# Altium PCB STM32_Breakout.PcbDoc (part 1 of 2)
Units mm, origin at the board's own origin, x right, y up, seen from the top; angles counter-clockwise.
Board outline 95 x 95 mm, 4 copper layers (F.Cu, In1.Cu, In2.Cu, B.Cu); 115 components, 175 nets, 535 pads, 365 vias.
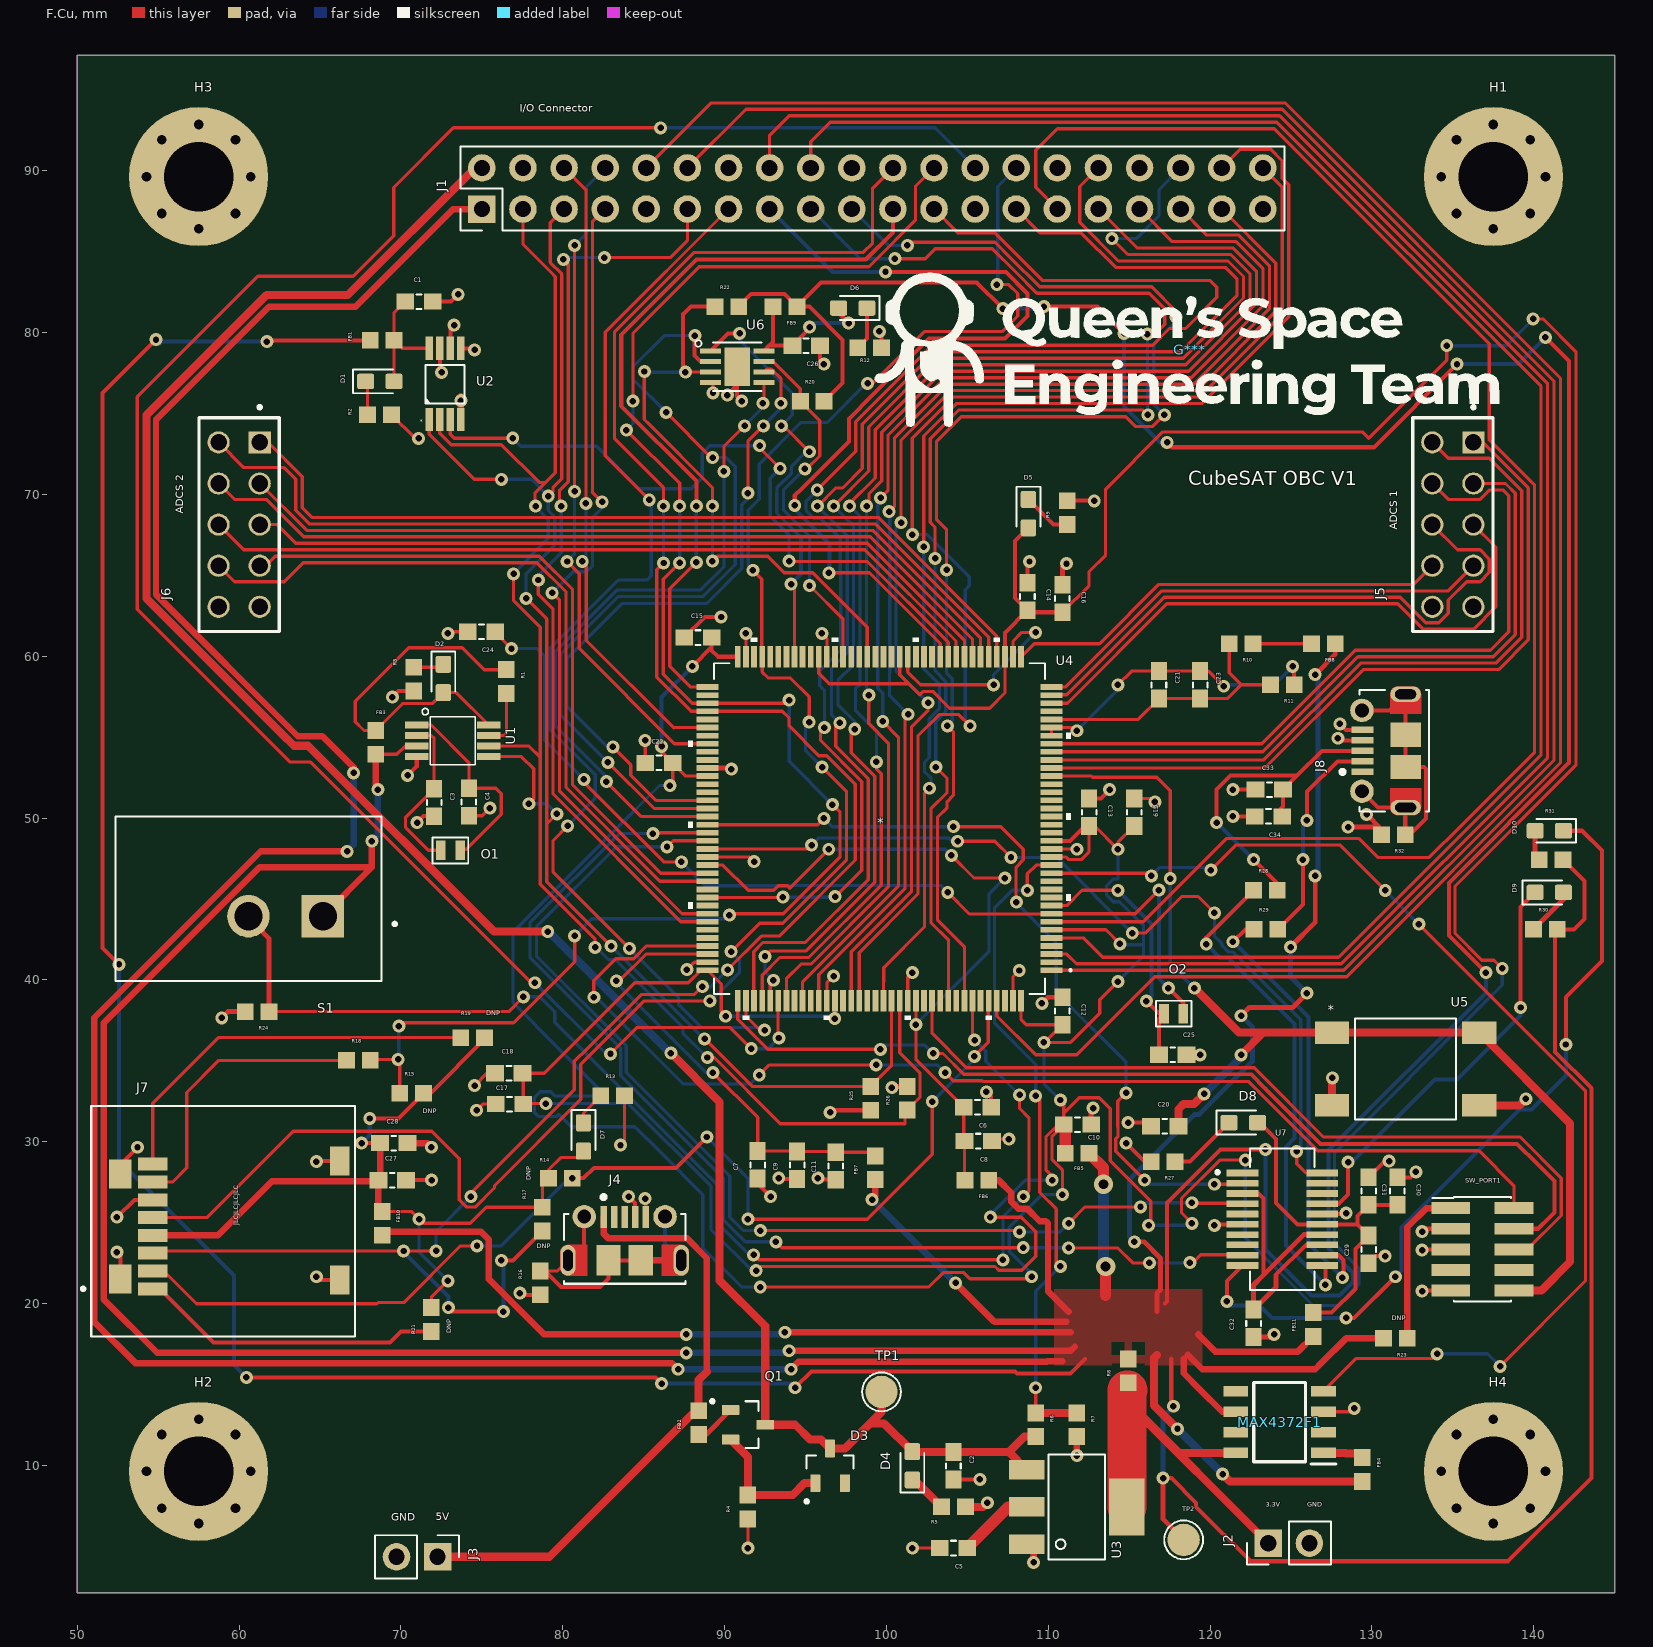
[diagram p0: F.Cu view]
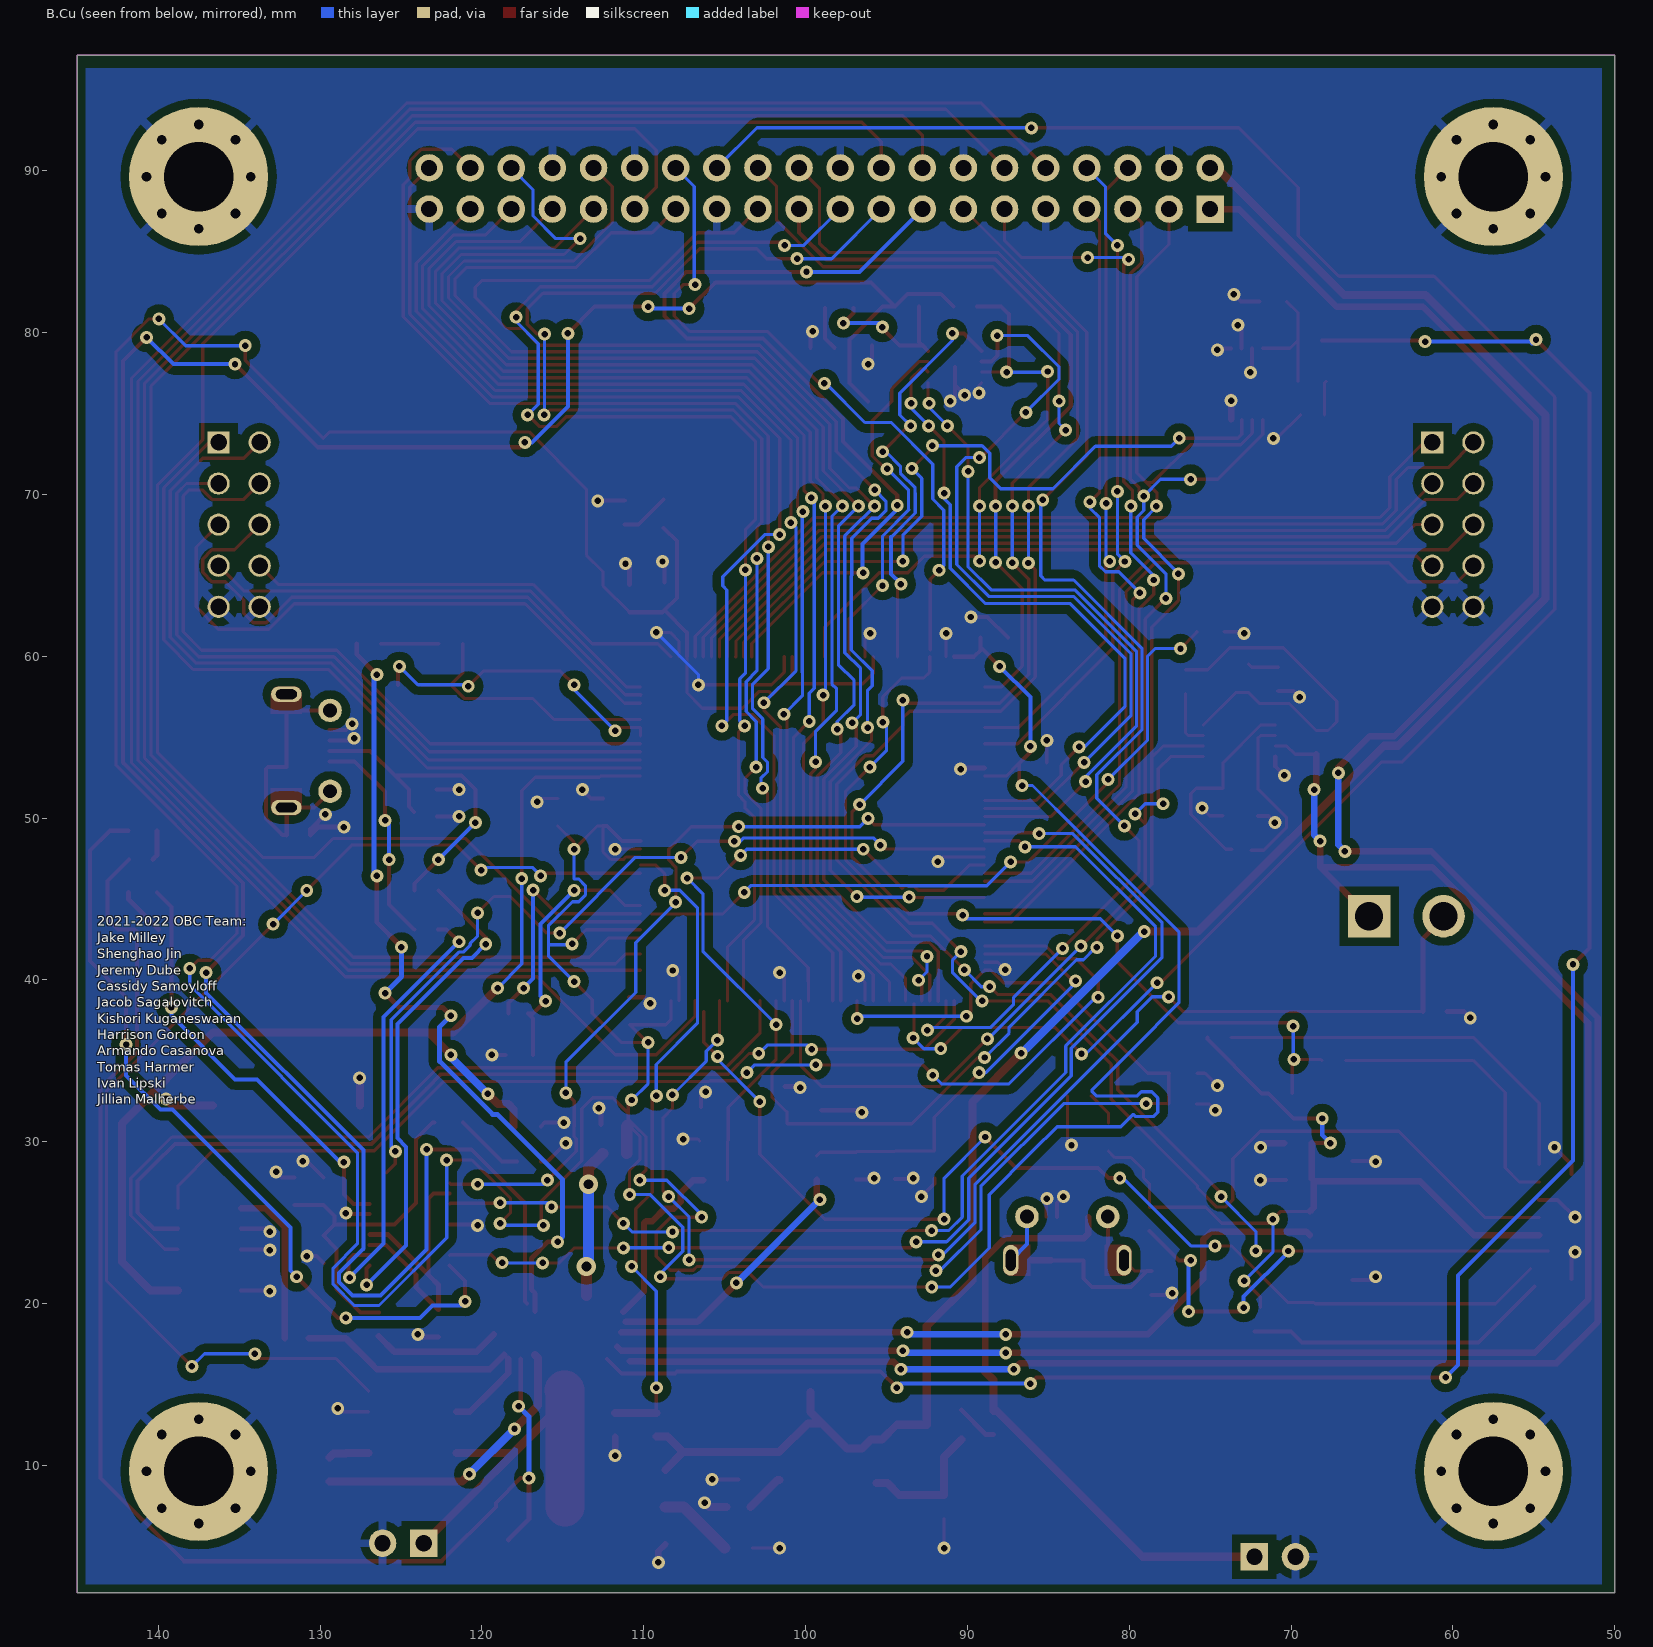
[diagram p1: B.Cu view, seen from below]

## Layer stack, top to bottom
F.Mask: solder mask 0.0102, Solder Resist, Dk 3.5
F.Cu: signal copper 0.0356
Dielectric 1: dielectric 0.32, FR-4, Dk 4.8
In1.Cu: signal copper 0.0356
Dielectric2: dielectric 0.32, FR-4, Dk 4.8
In2.Cu: signal copper 0.0356
Dielectric3: dielectric 0.32, FR-4, Dk 4.8
B.Cu: signal copper 0.0356
B.Mask: solder mask 0.0102, Solder Resist, Dk 3.5

## Board outline
145,2.13 145,97.13 50,97.13 50,2.13 145,2.13

## Design rules (kind name [scope] priority, off if disabled: settings)
Clearance "Clearence 0.508_Polygon" [InNamedPolygon('F.Cu-+3V3') OR InNamedPolygon('B.Cu-GND')] p1: gap=0.508 ignorepadtopadclearanceinfootprint=FALSE
MinimumSolderMaskSliver [All] p1: minsoldermaskwidth=0
PolygonConnect Polygon_B.Cu-GND_ConnectDirect [IsNamedPolygon('B.Cu-GND') vs IsVia] p1: connectstyle=Direct reliefconductorwidth=0.254 reliefentries=4 polygonreliefangle="90 Angle" airgapwidth=0.254
PolygonConnect Polygon_B.Cu-GND_ConnectRelief45 [IsNamedPolygon('B.Cu-GND') vs (IsThruPin or IsSMTPin) and (PadShape_AllLayers = 'Round')] p2: connectstyle=Relief reliefconductorwidth=0.508 reliefentries=4 polygonreliefangle="45 Angle" airgapwidth=0.508
PolygonConnect Polygon_B.Cu-GND_ConnectRelief90 [IsNamedPolygon('B.Cu-GND') vs (IsThruPin or IsSMTPin) and (PadShape_AllLayers <> 'Round')] p3: connectstyle=Relief reliefconductorwidth=0.508 reliefentries=4 polygonreliefangle="90 Angle" airgapwidth=0.508
PolygonConnect Polygon_F.Cu-+3V3_ConnectDirect [IsNamedPolygon('F.Cu-+3V3') vs IsVia] p4: connectstyle=Direct reliefconductorwidth=0.254 reliefentries=4 polygonreliefangle="90 Angle" airgapwidth=0.254
PolygonConnect Polygon_F.Cu-+3V3_ConnectRelief45 [IsNamedPolygon('F.Cu-+3V3') vs (IsThruPin or IsSMTPin) and (PadShape_AllLayers = 'Round')] p5: connectstyle=Relief reliefconductorwidth=0.508 reliefentries=4 polygonreliefangle="45 Angle" airgapwidth=0.508
PolygonConnect Polygon_F.Cu-+3V3_ConnectRelief90 [IsNamedPolygon('F.Cu-+3V3') vs (IsThruPin or IsSMTPin) and (PadShape_AllLayers <> 'Round')] p6: connectstyle=Relief reliefconductorwidth=0.508 reliefentries=4 polygonreliefangle="90 Angle" airgapwidth=0.508
RoutingVias [All] p1: holewidth=0.711 width=1.27 viastyle="Through Hole" minholewidth=0.711 minwidth=1.27 maxholewidth=0.711 maxwidth=1.27
SilkToSilkClearance [All] p1: silktosilkclearance=0
SilkToSolderMaskClearance [IsPad] p1: minsilkscreentomaskgap=0 clearancetoexposedcopper=TRUE
SolderMaskExpansion [All] p1: expansion=0.102 istentingtop=FALSE
Width [All] p1: maxlimit=10 minlimit=0.254 preferedwidth=0.254 midlayer1_maxwidth=0.254 midlayer2_maxwidth=0.254 minimp=50.000000 maximp=50.000000 favimp=50.000000
27 further rules are at their usual default settings.

## Components (designator, comment, footprint, x,y, rotation, side; value= is the part's Value field where it differs from the comment)
C1 "1uF" CAPC1608X90 71.115,81.91 r0 top
C2 "10uF" CAPC1608X90 104.14,9.97 r270 top
C3 "18pF" CAPC1608X90 72.05,50.963 r270 top
C4 "18pF" CAPC1608X90 74.2,50.993 r270 top
C5 "22uF" CAPC1608X90 104.14,4.89 r180 top
C6 "4.7u" CAPC1608X90 105.62,32.13 r180 top
C7 "4.7u" CAPC1608X90 92.04,28.57 r90 top
C8 "100n" CAPC1608X90 105.67,30.04 r180 top
C9 "100n" CAPC1608X90 94.48,28.55 r90 top
C10 "4.7u" CAPC1608X90 111.799,31.052 r180 top
C11 "100n" CAPC1608X90 96.87,28.5 r90 top
C12 "100n" CAPC1608X90 110.871,38.076 r270 top
C13 "100n" CAPC1608X90 112.522,50.356 r270 top
C14 "100n" CAPC1608X90 108.712,63.691 r270 top
C15 "100n" CAPC1608X90 88.353,61.151 r0 top
C16 "100n" CAPC1608X90 110.871,63.564 r270 top
C17 "100n" CAPC1608X90 76.708,32.322 r0 top
C18 "100n" CAPC1608X90 76.669,34.227 r0 top
C19 "100n" CAPC1608X90 115.316,50.356 r270 top
C20 "100n" CAPC1608X90 117.196,30.95 r0 top
C21 "1u" CAPC1608X90 116.84,58.23 r270 top
C22 "100n" CAPC1608X90 85.94,53.404 r0 top
C23 "100n" CAPC1608X90 119.38,58.23 r270 top
C24 "4.74pF" CAPC1608X90 74.98,61.513 r180 top
C25 "4.74pF" CAPC1608X90 117.69,35.37 r0 top
C26 "100n" CAPC1608X90 95.035,79.185 r180 top
C27 "10uF" CAPC1608X90 69.46,27.62 r0 top
C28 "0.1uF" CAPC1608X90 69.557,29.909 r0 top
C29 "4.7u" CAPC1608X90 129.794,23.344 r90 top
C30 "100n" CAPC1608X90 131.572,26.949 r270 top
C31 "100n" CAPC1608X90 129.794,26.949 r270 top
C32 "100n" CAPC1608X90 122.682,18.772 r90 top
C33 "47pF" CAPC1608X90 123.659,51.753 r0 top
C34 "47pF" CAPC1608X90 123.61,50.102 r180 top
D1 "RED" LED_0603_1608Metric_Pad1.05x0.95mm_HandSolder 68.695,76.98 r0 top
D2 "RED" LED_0603_1608Metric_Pad1.05x0.95mm_HandSolder 72.62,58.623 r270 top
D3 "10V" SOT91P240X110-3N 96.52,9.97 r90 top
D4 "RED" LED_0603_1608Metric_Pad1.05x0.95mm_HandSolder 101.6,9.97 r90 top
D5 "RED" LED_0603_1608Metric_Pad1.05x0.95mm_HandSolder 108.77,68.809 r270 top
D6 "RED" LED_0603_1608Metric_Pad1.05x0.95mm_HandSolder 97.915,81.51 r180 top
D7 "RED" LED_0603_1608Metric_Pad1.05x0.95mm_HandSolder 81.28,30.29 r270 top
D8 "RED" LED_0603_1608Metric_Pad1.05x0.95mm_HandSolder 122.047,31.179 r0 top
D9 "GREEN" LED_0603_1608Metric_Pad1.05x0.95mm_HandSolder 140.956,45.403 r0 top
D10 "GREEN" LED_0603_1608Metric_Pad1.05x0.95mm_HandSolder 140.956,49.213 r180 top
FB1 "100R @ 100 MHz" INDUC1607X60N 68.835,79.52 r0 top
FB2 "100R @ 100 MHz" INDUC1607X60N 88.392,12.637 r90 top
FB3 "100R @ 100 MHz" INDUC1607X60N 68.453,54.674 r90 top
FB4 "100R @ 100 MHz" INDUC1607X60N 129.413,9.743 r270 top
FB5 "100R @ 100 MHz" INDUC1607X60N 111.787,29.274 r0 top
FB6 "100R @ 100 MHz" INDUC1607X60N 105.59,27.63 r180 top
FB7 "100R @ 100 MHz" INDUC1607X60N 99.31,28.39 r90 top
FB8 "100R @ 100 MHz" INDUC1607X60N 127,60.77 r180 top
FB9 "100R @ 100 MHz" INDUC1607X60N 93.73,81.6 r180 top
FB10 "100R @ 100 MHz" INDUC1607X60N 68.834,24.956 r270 top
FB11 "100R @ 100 MHz" INDUC1607X60N 126.365,18.706 r90 top
G*** "LOGO" QSET_Logo 118.745,78.931 r0 top
H1 "MountingHole_Pad" MountingHole_4.3mm_M4_Pad_Via 137.5,89.63 r0 top
H2 "MountingHole_Pad" MountingHole_4.3mm_M4_Pad_Via 57.5,9.63 r0 top
H3 "MountingHole_Pad" MountingHole_4.3mm_M4_Pad_Via 57.5,89.63 r0 top
H4 "MountingHole_Pad" MountingHole_4.3mm_M4_Pad_Via 137.5,9.63 r0 top
J1 "Conn_02x20_Odd_Even" PinHeader_2x20_P2.54mm_Vertical 75,87.63 r90 top
J2 "1050171001" PinHeader_1x02_P2.54mm_Vertical 123.595,5.19 r90 top
J3 "1050171001" PinHeader_1x02_P2.54mm_Vertical 72.265,4.35 r270 top
J4 "105017-1001" MOLEX_105017-1001 83.82,22.67 r0 top
J5 "SSQ-105-03-T-D" SAMTEC_SSQ-105-03-T-D 135,68.13 r90 top
J6 "SSQ-105-03-T-D" SAMTEC_SSQ-105-03-T-D 60,68.13 r90 top
J7 "ST1W008S4ER1500-MicroSDConnector" JAE_ST1W008S4ER1500 58.663,24.758 r0 top
J8 "105017-1001" MOLEX_105017-1001 132.08,54.15 r90 top
MAX4372F1 "MAX4372FESA+" SOIC127P600X175-8N 124.29,12.67 r180 top
O1 "CM9V-T1A" CM9V-T1A 73.06,48.002 r0 top
O2 "CM9V-T1A" CM9V-T1A 117.745,37.91 r0 top
Q1 "Q_PMOS_DGS" SOT91P240X110-3N 91.44,12.51 r0 top
R1 "10k" RESC1607X60N 76.52,58.432 r270 top
R2 "2k2" RESC1607X60N 68.675,74.92 r0 top
R3 "2k2" RESC1607X60N 70.79,58.578 r270 top
R4 "10k" RESC1607X60N 91.44,7.43 r90 top
R5 "2k2" RESC1607X60N 104.14,7.43 r0 top
R6 "20k" RESC1607X60N 109.22,12.51 r270 top
R7 "10k" RESC1607X60N 111.76,12.51 r270 top
R8 "20m" RESC1607X60N 114.935,15.839 r90 top
R9 "2k2" RESC1607X60N 111.17,68.871 r90 top
R10 "10k +-1%" RESC1607X60N 121.92,60.77 r180 top
R11 "32.5k +-1%" RESC1607X60N 124.46,58.23 r180 top
R12 "2k2" RESC1607X60N 98.96,79.058 r0 top
R13 "2k2" RESC1607X60N 83.085,32.83 r0 top
R14 "47k" RESC1607X60N 79.85,27.75 r0 top
R15 "47k" RESC1607X60N 70.66,32.99 r0 top
R16 "0R" RESC1607X60N 78.613,21.273 r270 top
R17 "47k" RESC1607X60N 78.74,25.21 r270 top
R18 "33" RESC1607X60N 67.37,35.02 r0 top
R19 "47k" RESC1607X60N 74.43,36.43 r0 top
R20 "10k" RESC1607X60N 95.415,75.74 r0 top
R21 "47k" RESC1607X60N 71.882,19.014 r270 top
R22 "10k" RESC1607X60N 90.135,81.6 r0 top
R23 "0R" RESC1607X60N 131.445,17.844 r180 top
R24 "10k +-1%" RESC1607X60N 61.114,38.037 r180 top
R25 "10k" RESC1607X60N 99.02,32.68 r270 top
R26 "10k" RESC1607X60N 101.27,32.685 r90 top
R27 "2k2" RESC1607X60N 117.094,28.766 r180 top
R28 "27" RESC1607X60N 123.417,45.53 r0 top
R29 "27" RESC1607X60N 123.444,43.117 r0 top
R30 "2k2" RESC1607X60N 140.716,43.117 r0 top
R31 "2k2" RESC1607X60N 141.07,47.435 r0 top
R32 "0R" RESC1607X60N 131.318,48.959 r180 top
S1 "GF-123-0054" SW_GF-123-0054 60.579,45.022 r180 top
SW_PORT1 "Conn_02x05_Odd_Even" PinHeader_2x05_P1.27mm_Vertical_SMD 136.82,23.35 r0 top
TP1 "TestPoint" TestPoint_Pad_D2.0mm 99.695,14.542 r0 top
TP2 "TestPoint" TestPoint_Pad_D2.0mm 118.364,5.398 r0 top
U1 "MCP7940NT-I_MS" MCP7940NT-I-MS 73.2,54.773 r270 top
U2 "MCP9808" MCP9808 72.725,76.8 r0 top
U3 "BU33SA5WGWZ-E2-qsat-symb" BU33SA5WGWZ-E2 111.76,7.43 r270 top
U4 "STM32L4A6ZGT6P" LQFP144-20x20mm 99.568,49.34 r180 top
U5 "FSM6JSMATR" FSM6JSMATR 127.533,36.735 r0 top
U6 "MR25H10MDF" SON65P300X300X95-8N 90.775,77.88 r0 top
U7 "FT231XS-R" SOP63P599X175-20N 124.46,25.21 r0 top

## Footprints (in the part's own frame and the unit in brackets; to place one, negate y for a bottom-side part, rotate by r counter-clockwise, add the part's x,y. Pads: shape width x height; smd on the part's side, far side on the other; paste and mask are expansions set on the pad)
BU33SA5WGWZ-E2 [mm]
  rect 1.2x2.2 smd mask+0: 1(2.3,-3.1) 2(0,-3.1) 3(-2.3,-3.1)
  rect 3.5x2.2 smd mask+0: 4(0,3.1)
  silkscreen extent -3.25,-1.75 3.25,1.75
CAPC1608X90 [mm]
  rect 1.1x1 smd mask+0: 1(-0.85,0) 2(0.85,0)
  silkscreen extent -0.15,-0.45 0.15,0.45
CM9V-T1A [mm]
  rect 0.6x1.2 smd mask+0: 1(-0.6,0) 2(0.6,0)
  silkscreen extent -1.1,-0.8 1.1,0.8
FSM6JSMATR [mil]
  rect 83x55 smd mask+0: 1(0,0) 2(0,-177) 3(358,-177) 4(358,0)
  silkscreen extent 56,-212 302,34
INDUC1607X60N [mm]
  rect 1.04x1.02 smd mask+0: 1(-0.735,0) 2(0.735,0)
JAE_ST1W008S4ER1500 [mm]
  rect 1.8x0.8 smd mask+0: 1(-4,-3.85) 2(-4,-2.75) 3(-4,-1.65) 4(-4,-0.55) 5(-4,0.55) 6(-4,1.65) 7(-4,2.75) 8(-4,3.85)
  rect 1.2x1.8 smd mask+0: GND1(7.55,-3.3) GND2(7.55,4.05)
  rect 1.4x1.8 smd mask+0: GND3(-6,-3.25) GND4(-6,3.25)
  silkscreen extent -8.4,-6.8 8.5,7.45
LED_0603_1608Metric_Pad1.05x0.95mm_HandSolder [mm]
  rrect25% 1.05x0.95 smd mask+0: 1(-0.875,0) 2(0.875,0)
  silkscreen extent -1.66,-0.73 0.8,0.73
LQFP144-20x20mm [mm]
  rect 1.346x0.356 smd mask+0: 1(-10.625,8.75) 2(-10.625,8.25) 3(-10.625,7.75) 4(-10.625,7.25) 5(-10.625,6.75) 6(-10.625,6.25) 7(-10.625,5.75) 8(-10.625,5.25) 9(-10.625,4.75) 10(-10.625,4.25) 11(-10.625,3.75) 12(-10.625,3.25) 13(-10.625,2.75) 14(-10.625,2.25) 15(-10.625,1.75) 16(-10.625,1.25) 17(-10.625,0.75) 18(-10.625,0.25) 19(-10.625,-0.25) 20(-10.625,-0.75) 21(-10.625,-1.25) 22(-10.625,-1.75) 23(-10.625,-2.25) 24(-10.625,-2.75) 25(-10.625,-3.25) 26(-10.625,-3.75) 27(-10.625,-4.25) 28(-10.625,-4.75) 29(-10.625,-5.25) 30(-10.625,-5.75) 31(-10.625,-6.25) 32(-10.625,-6.75) 33(-10.625,-7.25) 34(-10.625,-7.75) 35(-10.625,-8.25) 36(-10.625,-8.75) 73(10.625,-8.75) 74(10.625,-8.25) 75(10.625,-7.75) 76(10.625,-7.25) 77(10.625,-6.75) 78(10.625,-6.25) 79(10.625,-5.75) 80(10.625,-5.25) 81(10.625,-4.75) 82(10.625,-4.25) 83(10.625,-3.75) 84(10.625,-3.25) 85(10.625,-2.75) 86(10.625,-2.25) 87(10.625,-1.75) 88(10.625,-1.25) 89(10.625,-0.75) 90(10.625,-0.25) 91(10.625,0.25) 92(10.625,0.75) 93(10.625,1.25) 94(10.625,1.75) 95(10.625,2.25) 96(10.625,2.75) 97(10.625,3.25) 98(10.625,3.75) 99(10.625,4.25) 100(10.625,4.75) 101(10.625,5.25) 102(10.625,5.75) 103(10.625,6.25) 104(10.625,6.75) 105(10.625,7.25) 106(10.625,7.75) 107(10.625,8.25) 108(10.625,8.75)
  rect 0.356x1.346 smd mask+0: 37(-8.75,-10.625) 38(-8.25,-10.625) 39(-7.75,-10.625) 40(-7.25,-10.625) 41(-6.75,-10.625) 42(-6.25,-10.625) 43(-5.75,-10.625) 44(-5.25,-10.625) 45(-4.75,-10.625) 46(-4.25,-10.625) 47(-3.75,-10.625) 48(-3.25,-10.625) 49(-2.75,-10.625) 50(-2.25,-10.625) 51(-1.75,-10.625) 52(-1.25,-10.625) 53(-0.75,-10.625) 54(-0.25,-10.625) 55(0.25,-10.625) 56(0.75,-10.625) 57(1.25,-10.625) 58(1.75,-10.625) 59(2.25,-10.625) 60(2.75,-10.625) 61(3.25,-10.625) 62(3.75,-10.625) 63(4.25,-10.625) 64(4.75,-10.625) 65(5.25,-10.625) 66(5.75,-10.625) 67(6.25,-10.625) 68(6.75,-10.625) 69(7.25,-10.625) 70(7.75,-10.625) 71(8.25,-10.625) 72(8.75,-10.625) 109(8.75,10.625) 110(8.25,10.625) 111(7.75,10.625) 112(7.25,10.625) 113(6.75,10.625) 114(6.25,10.625) 115(5.75,10.625) 116(5.25,10.625) 117(4.75,10.625) 118(4.25,10.625) 119(3.75,10.625) 120(3.25,10.625) 121(2.75,10.625) 122(2.25,10.625) 123(1.75,10.625) 124(1.25,10.625) 125(0.75,10.625) 126(0.25,10.625) 127(-0.25,10.625) 128(-0.75,10.625) 129(-1.25,10.625) 130(-1.75,10.625) 131(-2.25,10.625) 132(-2.75,10.625) 133(-3.25,10.625) 134(-3.75,10.625) 135(-4.25,10.625) 136(-4.75,10.625) 137(-5.25,10.625) 138(-5.75,10.625) 139(-6.25,10.625) 140(-6.75,10.625) 141(-7.25,10.625) 142(-7.75,10.625) 143(-8.25,10.625) 144(-8.75,10.625)
  silkscreen extent -11.88,-11.81 11.81,11.81
MCP7940NT-I-MS [mm]
  rect 0.45x1.45 smd mask+0: 1(-0.975,-2.225) 2(-0.325,-2.225) 3(0.325,-2.225) 4(0.975,-2.225) 5(0.975,2.225) 6(0.325,2.225) 7(-0.325,2.225) 8(-0.975,2.225)
  silkscreen extent -2,-1.9 1.48,1.4
MCP9808 [mm]
  rect 0.45x1.45 smd mask+0: 1(-0.975,-2.175) 2(-0.325,-2.175) 3(0.325,-2.175) 4(0.975,-2.175) 5(-0.975,2.225) 6(-0.325,2.225) 7(0.325,2.225) 8(0.975,2.225)
  silkscreen extent -1.2,-1.2 1.2,1.2
MOLEX_105017-1001 [mm]
  rect 0.4x1.35 smd mask+0: 1(-1.3,2.675) 2(-0.65,2.675) 3(0,2.675) 4(0.65,2.675) 5(1.3,2.675)
  rrect100% 0.95x1.9 hole 1.3 slot 0.6 at 0 deg paste-1.9 mask-1.9: S1(-3.5,0) S2(3.5,0)
  round 1.45 hole 0.85 paste-1.45 mask+0: S3(-2.5,2.7) S4(2.5,2.7)
  rect 1.5x1.9 smd mask+0: S5(-1,0) S6(1,0)
  F.Cu region: 3.525,0.949 3.55,0.947 3.574,0.944 3.599,0.94 3.623,0.934 3.647,0.927 3.67,0.918 3.693,0.909 3.716,0.898 3.738,0.886 3.759,0.873 3.779,0.859 3.799,0.844 3.818,0.828 3.836,0.811 3.853,0.793 3.869,0.774 3.884,0.754 3.898,0.734 3.911,0.712 3.923,0.691 3.934,0.668 3.943,0.645 3.952,0.622 3.959,0.598 3.965,0.574 3.969,0.549 3.972,0.525 3.974,0.5 3.975,0.475 3.975,-0.475 3.974,-0.5 3.972,-0.525 3.969,-0.549 3.965,-0.574 3.959,-0.598 3.952,-0.622 3.943,-0.645 3.934,-0.668 3.923,-0.691 3.911,-0.712 3.898,-0.734 3.884,-0.754 3.869,-0.774 3.853,-0.793 3.836,-0.811 3.818,-0.828 3.799,-0.844 3.779,-0.859 3.759,-0.873 3.738,-0.886 3.716,-0.898 3.693,-0.909 3.67,-0.918 3.647,-0.927 3.623,-0.934 3.599,-0.94 3.574,-0.944 3.55,-0.947 3.525,-0.949 3.5,-0.95 2.3,-0.95 2.3,0.95 3.5,0.95
  F.Cu region: -2.3,-0.95 -3.5,-0.95 -3.525,-0.949 -3.55,-0.947 -3.574,-0.944 -3.599,-0.94 -3.623,-0.934 -3.647,-0.927 -3.67,-0.918 -3.693,-0.909 -3.716,-0.898 -3.737,-0.886 -3.759,-0.873 -3.779,-0.859 -3.799,-0.844 -3.818,-0.828 -3.836,-0.811 -3.853,-0.793 -3.869,-0.774 -3.884,-0.754 -3.898,-0.734 -3.911,-0.712 -3.923,-0.691 -3.934,-0.668 -3.943,-0.645 -3.952,-0.622 -3.959,-0.598 -3.965,-0.574 -3.969,-0.549 -3.972,-0.525 -3.974,-0.5 -3.975,-0.475 -3.975,0.475 -3.974,0.5 -3.972,0.525 -3.969,0.549 -3.965,0.574 -3.959,0.598 -3.952,0.622 -3.943,0.645 -3.934,0.668 -3.923,0.691 -3.911,0.712 -3.898,0.734 -3.884,0.754 -3.869,0.774 -3.853,0.793 -3.836,0.811 -3.818,0.828 -3.799,0.844 -3.779,0.859 -3.759,0.873 -3.737,0.886 -3.716,0.898 -3.693,0.909 -3.67,0.918 -3.647,0.927 -3.623,0.934 -3.599,0.94 -3.574,0.944 -3.55,0.947 -3.525,0.949 -3.5,0.95 -2.3,0.95
  silkscreen extent -3.75,-1.45 3.75,4
MountingHole_4.3mm_M4_Pad_Via [mm]
  round 0.9 hole 0.6 paste-0.9 mask+0: 1(-3.225,0) 1(-2.28,-2.28) 1(-2.28,2.28) 1(0,-3.225) 1(0,3.225) 1(2.28,-2.28) 1(2.28,2.28) 1(3.225,0)
  round 8.6 hole 4.3 paste-8.6 mask+0: 1(0,0)
PinHeader_1x02_P2.54mm_Vertical [mm]
  rect 1.7x1.7 hole 1 paste-1.7 mask+0: 1(0,0)
  rrect100% 1.7x1.7 hole 1 paste-1.7 mask+0: 2(0,-2.54)
  silkscreen extent -1.33,-3.87 1.33,1.33
PinHeader_2x05_P1.27mm_Vertical_SMD [mm]
  rect 2.4x0.74 smd mask+0: 1(-1.95,2.54) 2(1.95,2.54) 3(-1.95,1.27) 4(1.95,1.27) 5(-1.95,0) 6(1.95,0) 7(-1.95,-1.27) 8(1.95,-1.27) 9(-1.95,-2.54) 10(1.95,-2.54)
  silkscreen extent -3.09,-3.23 1.77,3.23
PinHeader_2x20_P2.54mm_Vertical [mm]
  rect 1.7x1.7 hole 1 paste-1.7 mask+0: 1(0,0)
  rrect100% 1.7x1.7 hole 1 paste-1.7 mask+0: 2(2.54,0) 3(0,-2.54) 4(2.54,-2.54) 5(0,-5.08) 6(2.54,-5.08) 7(0,-7.62) 8(2.54,-7.62) 9(0,-10.16) 10(2.54,-10.16) 11(0,-12.7) 12(2.54,-12.7) 13(0,-15.24) 14(2.54,-15.24) 15(0,-17.78) 16(2.54,-17.78) 17(0,-20.32) 18(2.54,-20.32) 19(0,-22.86) 20(2.54,-22.86) 21(0,-25.4) 22(2.54,-25.4) 23(0,-27.94) 24(2.54,-27.94) 25(0,-30.48) 26(2.54,-30.48) 27(0,-33.02) 28(2.54,-33.02) 29(0,-35.56) 30(2.54,-35.56) 31(0,-38.1) 32(2.54,-38.1) 33(0,-40.64) 34(2.54,-40.64) 35(0,-43.18) 36(2.54,-43.18) 37(0,-45.72) 38(2.54,-45.72) 39(0,-48.26) 40(2.54,-48.26)
  silkscreen extent -1.33,-49.59 3.87,1.33
QSET_Logo [mm]
  silkscreen extent -19.45,-4.76 19.12,4.76
RESC1607X60N [mm]
  rect 1.04x1.02 smd mask+0: 1(-0.735,0) 2(0.735,0)
SAMTEC_SSQ-105-03-T-D [mm]
  rect 1.37x1.37 hole 1.02 paste-1.37 mask+0: 01(5.08,-1.27)
  round 1.37 hole 1.02 paste-1.37 mask+0: 02(5.08,1.27) 03(2.54,-1.27) 04(2.54,1.27) 05(0,-1.27) 06(0,1.27) 07(-2.54,-1.27) 08(-2.54,1.27) 09(-5.08,-1.27) 10(-5.08,1.27)
  silkscreen extent -6.61,-2.47 7.35,2.47
SOIC127P600X175-8N [mm]
  rect 1.525x0.65 smd mask+0: 1(-2.712,1.905) 2(-2.712,0.635) 3(-2.712,-0.635) 4(-2.712,-1.905) 5(2.712,-1.905) 6(2.712,-0.635) 7(2.712,0.635) 8(2.712,1.905)
  silkscreen extent -3.47,-2.45 1.6,2.58
SON65P300X300X95-8N [mm]
  rrect4% 1.3x0.32 smd mask+0: 1(-1.65,0.975) 2(-1.65,0.325) 3(-1.65,-0.325) 4(-1.65,-0.975) 5(1.65,-0.975) 6(1.65,-0.325) 7(1.65,0.325) 8(1.65,0.975)
  rect 1.59x2.4 smd paste-2.4 mask+0: 9(0,0)
  silkscreen extent -2.6,-1.5 1.5,1.64
SOP63P599X175-20N [mm]
  rrect2% 1.97x0.41 smd mask+0: 1(-2.47,2.858) 2(-2.47,2.223) 3(-2.47,1.588) 4(-2.47,0.953) 5(-2.47,0.318) 6(-2.47,-0.318) 7(-2.47,-0.953) 8(-2.47,-1.587) 9(-2.47,-2.222) 10(-2.47,-2.857) 11(2.47,-2.857) 12(2.47,-2.222) 13(2.47,-1.587) 14(2.47,-0.953) 15(2.47,-0.318) 16(2.47,0.318) 17(2.47,0.953) 18(2.47,1.588) 19(2.47,2.223) 20(2.47,2.858)
  silkscreen extent -4.1,-4.37 1.99,4.37
SOT91P240X110-3N [mm]
  rrect15% 1.09x0.61 smd mask+0: 1(-1.07,0.915) 2(-1.07,-0.915) 3(1.07,0)
  silkscreen extent -2.3,-1.45 0.65,1.55
SW_GF-123-0054 [mm]
  rect 2.625x2.625 hole 1.75 paste-2.625 mask+0: 1(-4.6,1.09)
  round 2.625 hole 1.75 paste-2.625 mask+0: 2(0,1.09)
  silkscreen extent -9.14,-5.08 8.23,5.08
TestPoint_Pad_D2.0mm [mm]
  round 2 smd paste-2 mask+0: 1(0,0)
  silkscreen extent -1.2,-1.2 1.2,1.2

## Part data
C1 C2 C3 C4 C5 C6 C7 C8 C9 C10 C11 C12 C13 C14 C15 C16 C17 C18 C19 C20 C21 C22 C23 C24 C25 C26 C27 C28 C29 C30 C31 C32 C33 C34: library part CAPC1608X90, "<b>CAPACITOR</b>", Sheetfile=STM32_Breakout.kicad_sch
D1 D2 D4 D5 D6 D7 D8 D9 D10: library part LED_0603_1608Metric_Pad1.05x0.95mm_HandSolder, "LED SMD 0603 (1608 Metric), square (rectangular) end terminal, IPC_7351 nominal, (Body size source: http://www.tortai-tech.com/upload/download/2011102023233369053.pdf), generated with kicad-footprint-generator", Sheetfile=STM32_Breakout.kicad_sch
D3 Q1: library part SOT91P240X110-3N, Sheetfile=STM32_Breakout.kicad_sch
FB1 FB2 FB3 FB4 FB5 FB6 FB7 FB8 FB9 FB10 FB11: library part INDUC1607X60N, Sheetfile=STM32_Breakout.kicad_sch
G***: library part QSET_Logo
H1 H2 H3 H4: library part MountingHole_4.3mm_M4_Pad_Via, "Mounting Hole 4.3mm, M4", Sheetfile=STM32_Breakout.kicad_sch
J1: library part PinHeader_2x20_P2.54mm_Vertical, "Through hole straight pin header, 2x20, 2.54mm pitch, double rows", Sheetfile=STM32_Breakout.kicad_sch
J2 J3: library part PinHeader_1x02_P2.54mm_Vertical, "Through hole straight pin header, 1x02, 2.54mm pitch, single row", Sheetfile=STM32_Breakout.kicad_sch
J4 J8: library part MOLEX_105017-1001, Manufacturer=MOLEX, MAXIMUM_PACKAGE_HIEGHT=2.9mm, PARTREV=F, STANDARD="Manufacturer Recommendations", Sheetfile=STM32_Breakout.kicad_sch
J5 J6: library part SAMTEC_SSQ-105-03-T-D, Manufacturer=Samtec, PARTREV=R, STANDARD="Manufacturer Recommendations", Sheetfile=STM32_Breakout.kicad_sch
J7: library part JAE_ST1W008S4ER1500, Manufacturer="JAE Electronics", MAXIMUM_PACKAGE_HEIGHT="2.0 mm", PARTREV=2, STANDARD="Manufacturer Recommendations", Sheetfile=STM32_Breakout.kicad_sch
MAX4372F1: library part SOIC127P600X175-8N, "S8+2", Sheetfile=STM32_Breakout.kicad_sch
R1 R2 R3 R4 R5 R6 R7 R8 R9 R10 R11 R12 R13 R14 R15 R16 R17 R18 R19 R20 R21 R22 R23 R24 R25 R26 R27 R28 R29 R30 R31 R32: library part RESC1607X60N, Sheetfile=STM32_Breakout.kicad_sch
S1: library part SW_GF-123-0054, Manufacturer="CW Industries", MAXIMUM_PACKAGE_HIEGHT="14.96 mm", PARTREV="May 20, 2003", STANDARD="Manufacturer Recommendations", Sheetfile=STM32_Breakout.kicad_sch
SW_PORT1: library part PinHeader_2x05_P1.27mm_Vertical_SMD, "surface-mounted straight pin header, 2x05, 1.27mm pitch, double rows", Sheetfile=STM32_Breakout.kicad_sch
TP1 TP2: library part TestPoint_Pad_D2.0mm, "SMD pad as test Point, diameter 2.0mm", Sheetfile=STM32_Breakout.kicad_sch
U1: library part MCP7940NT-I-MS, Sheetfile=STM32_Breakout.kicad_sch
U3: library part BU33SA5WGWZ-E2, Sheetfile=STM32_Breakout.kicad_sch
U4: library part LQFP144-20x20mm, Sheetfile=STM32_Breakout.kicad_sch
U6: library part SON65P300X300X95-8N, Sheetfile=STM32_Breakout.kicad_sch
U7: library part SOP63P599X175-20N, Manufacturer=FTDI, PARTREV=1.2, STANDARD="IPC 7351B", Sheetfile=STM32_Breakout.kicad_sch
O1 O2 U2 U5: Sheetfile=STM32_Breakout.kicad_sch

## Via types
v1: diameter 0.8, hole 0.4, F.Cu to B.Cu, tented both sides, 363 vias
v2: diameter 1.2, hole 0.6, F.Cu to B.Cu, tented both sides, 2 vias

## Nets (pads, with @x,y where several pads share a name; then routed paths per layer and width w, separated by ;. In a path a pad name is that pad's centre, name@x,y a point inside that pad or via, vN(x,y) a via of type N, cw(c..) or ccw(c..) an arc to the next point about the centre after c; other vN are vias at no path point)
5V_Input: FB2.2 J3.1 J4.1 | length 37.5
  F.Cu w0.4: J4.1@82.52,25.345 82.52,24.321 82.821,24.02 87.682,24.02 88.9,22.802 88.9,15.785
  F.Cu w0.5: J3.1@72.265,4.35 79.18,4.35 88.202,13.372 FB2.2@88.392,13.372 88.392,15.277 88.9,15.785
+3.3VA: U4.33
+3V3: FB1.1 FB3.1 FB4.2 FB5.2 FB6.1 FB7.1 FB8.1 FB9.1 FB10.2 FB11.1 J1.1 MAX4372F1.6 R8.2 R20.2 R22.2 R23.2 R30.2 R31.2 S1.1 TP2.1 U1.3 | length 833.2
  F.Cu w0.2: FB3.1@68.453,53.939 69.75,53.939 70.259,54.448 U1.3@70.975,54.448
  F.Cu w0.25: v1(52.578,40.958) 51.562,41.974 51.562,76.264 v1(54.864,79.566) ; v1(60.452,15.431) 85.725,15.431 v1(86.106,15.05) ; v1(61.722,79.439) 61.803,79.52 FB1.1@68.1,79.52 ; R22.2@90.87,81.6 91.645,82.375 93.69,82.375 FB9.1@94.465,81.6 ; v1(94.361,14.796) 95.372,15.807 107.955,15.807 108.077,15.685 111.379,15.685 112.268,16.574 ; R20.2@96.15,75.74 97.295,76.885 97.295,79.54 95.235,81.6 FB9.1@94.465,81.6 ; v1(107.188,81.471) 105.578,83.081 95.946,83.081 FB9.1@94.465,81.6 ; v1(109.728,81.598) 113.03,81.598 v1(114.681,79.947) ; v1(117.094,9.208) 117.602,9.208 119.126,7.684 119.126,7.43 122.48,4.075 138.401,4.075 143.554,9.228 143.554,33.302 141.321,35.534 141.321,42.987 R30.2@141.451,43.117 142.494,43.117 143.129,43.752 143.129,46.121 141.815,47.435 R31.2@141.805,47.435 ; 117.221,20.003 117.348,20.13 117.348,26.226 120.65,29.528 v1(123.415,29.528) ; v1(117.348,73.216) 117.655,72.909 130.122,72.909 v1(135.255,78.042) ; v1(137.033,40.45) 134.747,42.736 134.747,45.986 142.177,53.416 142.177,78.233 v1(140.716,79.693)
  F.Cu w0.3: v1(115.316,23.813) 115.917,23.813 116.934,22.796 116.934,20.859 116.713,20.638 116.713,19.495 ; v1(117.094,9.208) 117.094,6.668 TP2.1@118.364,5.398 ; 117.602,16.574 117.602,13.78 v1(117.729,13.653) ; v1(121.92,37.783) 122.428,38.291 125.095,38.291 v1(125.984,39.18) ; v1(124.968,42.029) 126.492,43.553 v1(126.492,46.419) ; v1(126.492,58.865) 127.735,60.108 FB8.1@127.735,60.77
  F.Cu w0.4: S1.1@65.179,43.932 68.199,46.952 ; v1(66.675,47.943) 61.341,47.943 51.054,37.656 51.054,18.86 53.594,16.32 57.023,16.32 86.741,16.32 v1(87.122,15.939) ; v1(67.071,52.784) 67.071,53.135 65.151,55.055 63.627,55.055 54.864,63.818 54.864,74.613 61.849,81.598 67.191,81.598 73.223,87.63 J1.1@75,87.63 ; v1(68.199,48.578) 68.199,46.952 ; FB3.1@68.453,53.939 68.453,52.007 68.453,51.88 v1(68.58,51.753) ; FB10.2@68.834,24.221 69.061,24.448 74.93,24.448 75.438,23.94 75.438,21.497 78.837,18.098 v1(87.63,18.098) ; v1(87.63,16.955) 54.937,16.955 51.624,20.268 51.624,37.313 61.263,46.952 68.199,46.952 ; v1(93.726,18.225) 108.204,18.225 111.379,18.225 ; v1(93.98,17.082) 108.077,17.082 111.379,17.082 111.633,17.336 ; v1(94.107,15.939) 94.558,16.39 109.912,16.39 109.97,16.447 110.871,16.447 ; v1(99.118,26.422) 99.31,26.614 FB7.1@99.31,27.655 ; v1(104.267,21.273) 106.68,18.86 111.125,18.86 ; FB6.1@106.325,27.63 106.927,27.63 107.718,26.839 107.718,26.301 108.152,25.867 108.69,25.867 109.474,25.083 109.855,25.083 109.982,24.956 109.982,20.765 111.252,19.495 ; 118.364,16.574 118.364,16.32 118.364,15.939 118.364,15.685 119.38,14.669 120.744,13.305 MAX4372F1.6@121.578,13.305 ; 118.618,16.828 119.507,15.939 120.396,15.939 126.492,15.939 126.873,16.32 128.397,17.844 R23.2@130.71,17.844 ; 119.253,18.098 120.319,17.032 125.426,17.032 FB11.1@126.365,17.971
  F.Cu w0.5: 116.713,16.828 116.535,16.65 116.535,15.05 116.535,13.704 v1(117.983,12.256) ; v1(120.777,9.462) 121.231,9.008 FB4.2@129.413,9.008
  F.Cu w0.7: FB5.2@112.522,29.274 113.411,28.385 v2(113.411,27.369) ; 113.538,20.511 v2(113.538,22.289)
  B.Cu w0.25: v1(52.578,40.958) 52.578,28.842 59.69,21.73 59.69,16.193 v1(60.452,15.431) ; v1(54.864,79.566) 55.118,79.312 55.245,79.439 v1(61.722,79.439) ; v1(86.106,15.05) 94.107,15.05 v1(94.361,14.796) ; v1(107.188,81.471) 109.601,81.471 v1(109.728,81.598) ; v1(114.681,79.947) 114.681,75.44 116.905,73.216 v1(117.348,73.216) ; v1(123.415,29.528) 123.415,23.334 126.268,20.481 127.981,20.481 128.83,21.331 128.83,21.881 127.326,23.385 127.326,29.473 137.033,39.18 v1(137.033,40.45) ; v1(135.255,78.042) 139.065,78.042 v1(140.716,79.693)
  B.Cu w0.3: v1(115.316,23.813) 115.007,24.122 115.007,27.655 119.04,31.687 119.339,31.687 122.61,34.957 122.61,37.093 v1(121.92,37.783) ; v1(117.094,9.208) 117.094,13.018 v1(117.729,13.653) ; v1(124.968,42.029) 124.968,40.196 v1(125.984,39.18) ; v1(126.492,46.419) 126.674,46.601 126.674,58.683 v1(126.492,58.865)
  B.Cu w0.4: v1(66.675,47.943) 66.929,48.197 67.071,48.339 v1(67.071,52.784) ; v1(68.199,48.578) 68.58,48.959 v1(68.58,51.753) ; v1(87.122,15.939) v1(94.107,15.939) ; v1(87.63,16.955) 93.853,16.955 v1(93.98,17.082) ; v1(87.63,18.098) 93.599,18.098 v1(93.726,18.225) ; v1(99.118,26.422) v1(104.267,21.273)
  B.Cu w0.5: v1(117.983,12.256) v1(120.777,9.462)
  B.Cu w0.7: v2(113.411,27.369) 113.411,22.416 v2(113.538,22.289)
+5V: C2.1 D3.3 D4.2 J1.2 Q1.3 R6.2 TP1.1 U3.3 | length 130.4
  F.Cu w0.5: J1.2@75,90.17 74.57,90.17 66.71,82.31 61.69,82.31 54.274,74.894 54.274,63.574 62.649,55.199 63.383,54.465 64.26,54.465 75.745,42.98 v1(79.07,42.98) ; v1(86.681,35.471) 89.69,32.463 89.69,21.43 92.51,18.61 Q1.3@92.51,12.51 94.361,12.51 95.276,11.595 95.965,11.595 D3.3@96.52,11.04 97.435,11.04 98.982,12.588 ; TP1.1@99.695,14.542 99.695,13.3 98.982,12.588 ; U3.3@108.66,9.73 107.57,10.82 ; R6.2@109.22,11.775 108.525,11.775 107.57,10.82 ; 98.982,12.588 99.857,12.588 D4.2@101.6,10.845 101.625,10.82 C2.1@104.14,10.82 107.57,10.82
  B.Cu w0.4: v1@86.579,35.471 v1(86.681,35.471)
  B.Cu w0.5: v1(79.07,42.98) 79.12,42.98 86.37,35.73
ADC3_IN6: MAX4372F1.4 U4.13 | length 71.7
  F.Cu w0.2: U4.13@110.193,46.59 116.204,46.59 v1(116.366,46.429) ; v1(120.047,46.783) 121.604,48.34 128.01,48.34 v1(130.82,45.53) ; MAX4372F1.4@127.002,14.575 129.037,16.61 133.741,16.61 v1(134.02,16.889) ; v1(132.9,43.44) 143.189,33.151 143.189,29.16 143.189,21.39 v1(137.915,16.115)
  B.Cu w0.2: v1(116.366,46.429) 116.886,46.948 119.882,46.948 v1(120.047,46.783) ; v1(130.82,45.53) 130.82,45.52 v1(132.9,43.44) ; v1(134.02,16.889) 137.141,16.889 v1(137.915,16.115)
ADC3_IN7: R6.1 R7.1 U4.14 | length 41.3
  F.Cu w0.2: v1(108.71,45.53) 108.71,45.72 108.7,45.73 108.7,46.547 109.243,47.09 U4.14@110.193,47.09 ; R6.1@109.22,13.245 v1(109.22,14.796) ; v1(109.22,32.83) 109.474,32.576 109.474,26.861 110.49,25.845 110.49,22.543 v1(110.744,22.289)
  F.Cu w0.5: R6.1@109.22,13.245 R7.1@111.76,13.245
  B.Cu w0.2: v1(108.71,45.53) 107.76,45.53 106.68,44.45 106.68,37.308 109.22,34.768 v1(109.22,32.83) ; v1(109.22,14.796) 109.22,20.765 v1(110.744,22.289)
ADC12_IN5: J5.05 U4.34 | length 36.9
  F.Cu w0.2: U4.34@110.193,57.09 111.185,57.09 117.33,63.235 131.587,63.235 133.157,61.666 136.278,61.666 137.654,63.042 137.654,66.746 J5.05@136.27,68.13
ADC12_IN6: J5.06 U4.35 | length 37.3
  F.Cu w0.2: U4.35@110.193,57.59 110.17,57.613 111.143,57.613 117.165,63.635 131.753,63.635 133.322,62.065 134.138,62.065 134.715,62.642 134.715,63.47 135.85,64.605 136.678,64.605 137.255,65.182 137.255,65.998 136.678,66.575 135.285,66.575 J5.06@133.73,68.13
ADC12_IN7: J5.07 U4.36 | length 29.2
  F.Cu w0.2: U4.36@110.193,58.09 111.055,58.09 117,64.035 134.715,64.035 J5.07@136.27,65.59
ADC12_IN8: J5.08 U4.37 | length 27.7
  F.Cu w0.2: U4.37@108.318,59.965 109.123,60.77 113.17,60.77 116.834,64.434 132.574,64.434 J5.08@133.73,65.59
ADC12_IN9: J6.01 U4.40 | length 52.9
  F.Cu w0.2: J6.01@61.27,73.21 61.785,73.21 63.9,71.095 63.9,69.17 64.498,68.572 68.58,68.572 99.486,68.572 106.818,61.24 U4.40@106.818,59.965
ADC12_IN10: J6.02 U4.41 | length 54.9
  F.Cu w0.2: J6.02@58.73,73.21 60.285,71.655 62.775,71.655 63.5,70.93 63.5,69.005 64.332,68.173 99.32,68.173 106.318,61.175 U4.41@106.318,59.965
ADC12_IN11: J6.03 U4.42 | length 49.7
  F.Cu w0.2: J6.03@61.27,70.67 64.167,67.773 76.2,67.773 99.155,67.773 105.818,61.11 U4.42@105.818,59.965
ADC12_IN12: J6.04 U4.43 | length 51.7
  F.Cu w0.2: J6.04@58.73,70.67 59.715,69.685 61.678,69.685 63.99,67.374 98.989,67.374 105.318,61.045 U4.43@105.318,59.965
ADC12_IN13: J6.05 U4.44 | length 47.5
  F.Cu w0.2: J6.05@61.27,68.13 62.344,68.13 63.5,66.974 98.824,66.974 104.818,60.98 U4.44@104.818,59.965
ADC12_IN14: J6.06 U4.45 | length 49.5
  F.Cu w0.2: J6.06@58.73,68.13 60.285,66.575 98.658,66.575 104.295,60.938 104.295,59.988 U4.45@104.318,59.965
ADC12_IN15: J6.07 U4.96 | length 43.1
  F.Cu w0.2: J6.07@61.27,65.59 61.64,65.59 62.225,66.175 78.555,66.175 80.6,64.13 80.6,52.05 86.06,46.59 U4.96@88.943,46.59
ADC12_IN16: J6.08 U4.97 | length 46.3
  F.Cu w0.2: J6.08@58.73,65.59 59.715,64.605 62.8,64.605 63.97,65.775 78.39,65.775 80.2,63.965 80.2,51.885 85.995,46.09 U4.97@88.943,46.09
ADC123_IN1: J5.01 U4.26 | length 46.7
  F.Cu w0.2: U4.26@110.193,53.09 123.379,53.09 129.461,59.172 137.822,59.172 139.652,61.002 139.652,70.399 136.841,73.21 J5.01@136.27,73.21
ADC123_IN2: J5.02 U4.27 | length 48
  F.Cu w0.2: U4.27@110.193,53.59 123.314,53.59 129.295,59.571 137.656,59.571 139.252,61.167 139.252,61.498 139.252,70.234 137.26,72.225 134.715,72.225 J5.02@133.73,73.21
ADC123_IN3: J5.03 U4.28 | length 50.5
  F.Cu w0.2: U4.28@110.193,54.09 123.249,54.09 129.13,59.971 ; J5.03@136.27,70.67 138.251,70.67 138.853,70.068 138.853,61.333 137.491,59.971 136.361,59.971 ; 129.13,59.971 136.361,59.971 ; 129.13,59.971 136.361,59.971
ADC123_IN4: J5.04 U4.29 | length 45.1
  F.Cu w0.2: U4.29@110.193,54.59 123.184,54.59 128.965,60.37 137.325,60.37 138.453,61.498 138.453,69.903 138.085,70.27 137.255,70.27 137.255,70.262 136.678,69.685 134.715,69.685 J5.04@133.73,70.67
BOOT0: R24.1 S1.2 U4.138 | length 80.5
  F.Cu w0.2: R24.1@61.849,38.037 76.658,38.037 v1(77.57,38.95) ; v1(91.79,23.01) 92.1,22.7 v1(107.2,22.7) ; U4.138@105.318,38.715 105.318,36.402 v1(105.445,36.275) ; v1(108.222,32.885) 108.222,32.058 108.8,31.48 108.8,26.949 v1(108.458,26.607)
  F.Cu w0.3: S1.2@60.212,44.186 S1.2@61.438,42.96 ; S1.2@60.579,43.932 61.438,43.073 S1.2@61.438,42.96 ; R24.1@61.849,38.037 61.849,42.549 S1.2@61.438,42.96
  B.Cu w0.2: v1(77.57,38.95) 78.585,38.95 79.507,38.027 79.507,37.383 89.521,27.37 89.521,25.01 91.521,23.01 v1(91.79,23.01) ; v1(105.445,36.275) 106.13,35.59 106.13,34.978 v1(108.222,32.885) ; v1(107.2,22.7) 107.2,25.349 v1(108.458,26.607)
GND: C1.2 C2.2 C3.2 C4.2 C5.2 C6.1 C7.1 C8.1 C9.1 C10.1 C11.1 C12.1 C13.1 C14.1 C15.1 C16.1 C17.1 C18.1 C19.1 C20.1 C22.1 C24.2 C25.2 C26.1 C27.2 C28.2 C29.1 C30.1 C31.1 C32.1 C33.1 C34.2 H1.1 H2.1 H3.1 H4.1 J1.4 J1.9 J1.14 J1.20 J1.25 J1.30 J1.34 J1.39 J2.2 J3.2 J4.4 J4.5 J5.09 J5.10 J6.09 J6.10 J7.6 J7.GND1 J7.GND2 J7.GND3 J7.GND4 J8.4 J8.5 MAX4372F1.3 R2.2 R3.2 R4.1 R5.2 R7.2 R9.2 R12.2 R13.2 R16.2 R24.2 R25.2 R26.2 R27.2 R32.2 SW_PORT1.3 SW_PORT1.5 SW_PORT1.9 U1.4 U2.4 U2.6 U2.7 U2.8 U3.1 U4.16 U4.38 U4.51 U4.61 U4.71 U4.83 U4.94 U4.107 U4.120 U4.130 U4.143 U5.2 U5.3 U6.4 U6.9 U7.6 U7.16 | length 145.3
  F.Cu w0.2: R2.2@69.41,74.92 70.874,73.456 v1(71.094,73.456) ; v1@73.006,61.513 C24.2@74.13,61.513 ; C4.2@74.2,50.143 75.033,50.143 v1(75.5,50.61) ; v1(74.549,33.465) 75.311,34.227 C18.1@75.819,34.227 ; v1(74.676,31.941) 75.057,32.322 C17.1@75.858,32.322 ; v1(83.566,29.782) 83.82,30.036 R13.2@83.82,32.83 ; v1(85.09,26.48) 85.12,26.45 J4.5@85.12,25.345 ; C22.1@85.09,53.404 v1(85.09,54.801) ; v1(87.67,40.626) 88.134,41.09 U4.107@88.943,41.09 ; U4.94@88.943,47.59 91.539,47.59 v1(91.821,47.308) ; U6.4@89.125,76.905 89.281,76.749 v1(89.281,76.264) ; v1(91.313,61.405) 91.318,61.4 U4.71@91.318,59.965 ; v1(91.44,4.89) R4.1@91.44,6.695 ; v1(96.012,61.405) 96.318,61.099 U4.61@96.318,59.965 ; U4.120@96.318,38.715 96.318,39.819 v1(96.732,40.233) ; U4.130@101.318,38.715 101.318,40.168 v1(101.6,40.45) ; U4.51@101.318,59.965 101.318,59.015 102.103,58.23 v1(106.618,58.23) ; v1(101.6,4.89) C5.2@103.29,4.89 ; C8.1@106.52,30.04 106.643,30.163 v1(107.569,30.163) ; U4.143@107.818,38.715 107.818,40.191 v1(108.204,40.577) ; U4.38@107.818,59.965 107.818,60.915 108.373,61.47 v1(109.22,61.47) ; U4.16@110.193,48.09 111.74,48.09 v1(111.76,48.07) ; C19.1@115.316,51.206 116.371,51.206 v1(116.586,50.991) ; MAX4372F1.3@127.002,13.305 128.684,13.305 v1(128.905,13.526)
  F.Cu w0.25: v1(52.451,23.178) 52.663,22.966 J7.GND3@52.663,21.508 ; v1(52.451,25.337) 53.522,26.408 J7.6@54.664,26.408 ; J7.GND4@52.663,28.008 52.663,28.597 v1(53.721,29.655) ; v1(64.77,21.654) 64.966,21.458 J7.GND1@66.213,21.458 ; v1(64.77,28.766) 64.812,28.808 J7.GND2@66.213,28.808 ; v1(69.469,57.468) 69.844,57.843 R3.2@70.79,57.843 ; C27.2@70.31,27.62 v1(71.89,27.62) ; v1(70.41,52.63) 70.975,53.195 U1.4@70.975,53.798 ; v1(70.993,49.721) 71.385,50.113 C3.2@72.05,50.113 ; C1.2@71.965,81.91 73.083,81.91 v1(73.533,82.36) ; U2.6@72.4,79.025 72.4,77.651 v1(72.517,77.534) ; U2.7@73.05,79.025 73.05,80.226 v1(73.279,80.455) ; U2.8@73.7,79.025 74.455,79.025 v1(74.549,78.931) ; v1(77.343,20.638) 77.443,20.538 R16.2@78.613,20.538 ; v1(84.074,26.607) 84.47,26.211 J4.4@84.47,25.345 ; C15.1@87.503,61.151 88.773,62.421 v1(89.789,62.421) ; v1(90.17,76.137) 90.775,76.742 U6.9@90.775,77.88 90.775,76.04 v1(91.059,75.756) ; C7.1@92.04,27.72 92.04,27.404 v1(92.837,26.607) ; v1(93.345,27.75) 93.395,27.7 C9.1@94.48,27.7 ; v1(95.758,27.75) 95.858,27.65 C11.1@96.87,27.65 ; C26.1@95.885,79.185 95.885,78.296 v1(96.139,78.042) ; v1(99.568,80.074) 99.695,79.947 R12.2@99.695,79.058 ; C2.2@104.14,9.12 105.76,9.12 v1(105.77,9.13) ; v1(106.172,33.082) 106.47,32.784 C6.1@106.47,32.13 ; C14.1@108.712,64.541 108.712,65.723 v1(108.839,65.85) ; R9.2@111.17,69.606 112.825,69.606 v1(112.84,69.591) ; C13.1@112.522,51.206 113.245,51.206 v1(113.792,51.753) ; v1(114.808,29.909) 115.951,28.766 R27.2@116.359,28.766 ; v1(114.935,31.179) 116.117,31.179 C20.1@116.346,30.95 ; C25.2@118.54,35.37 v1(119.38,35.37) ; v1(120.269,24.829) 120.332,24.893 U7.6@121.99,24.893 ; v1(121.412,50.102) C34.2@122.76,50.102 ; v1(121.412,51.753) C33.1@122.809,51.753 ; U7.16@126.93,25.528 128.333,25.528 v1(128.397,25.591) ; v1(127.889,54.928) 128.017,54.8 J8.4@129.405,54.8 ; v1(128.016,55.817) 128.383,55.45 J8.5@129.405,55.45 ; C29.1@129.794,22.494 130.224,22.924 v1(130.81,22.924) ; C31.1@129.794,27.799 130.796,28.801 v1(131.064,28.801) ; C30.1@131.572,27.799 132.383,27.799 v1(132.715,28.131) ; v1(133.096,20.765) 133.141,20.81 SW_PORT1.9@134.87,20.81 ; v1(133.096,23.305) 133.141,23.35 SW_PORT1.5@134.87,23.35 ; v1(133.096,24.448) 133.268,24.62 SW_PORT1.3@134.87,24.62
  F.Cu w0.3: v1(58.928,37.656) 59.309,38.037 R24.2@60.379,38.037 ; U4.83@88.943,53.09 90.357,53.09 v1(90.424,53.023) ; v1(96.52,31.809) 96.655,31.945 R25.2@99.02,31.945 ; v1(100.33,33.338) 100.584,33.338 100.666,33.42 R26.2@101.27,33.42 100.754,33.42 ; v1(109.601,38.545) 109.982,38.926 C12.1@110.871,38.926 ; C16.1@110.871,64.414 110.871,65.469 v1(111.125,65.723) ; C10.1@112.649,31.052 112.649,31.941 v1(112.776,32.068) ; C32.1@122.682,17.922 123.776,17.922 v1(123.952,18.098) ; v1(128.524,49.439) 130.103,49.439 R32.2@130.583,48.959 130.583,49.313 v1(129.667,50.229)
  F.Cu w0.4: C28.2@70.407,29.909 71.628,29.909 v1(71.882,29.655) ; U2.4@73.7,74.625 v1@73.7,76.05 ; U3.1@108.66,5.13 109.093,4.697 v1(109.093,4.001) ; v1(111.76,10.605) R7.2@111.76,11.775
  F.Cu w0.5: R5.2@104.875,7.43 105.97,7.43 v1(106.23,7.69) ; U5.2@127.533,32.24 127.533,33.923 v1(127.55,33.94) ; U5.3@136.627,32.24 139.11,32.24 v1(139.515,32.645)
  B.Cu w0.2: v1(106.618,58.23) 106.618,58.868 v1(109.22,61.47)
  other v1: 72.898,61.405 73.7,75.796
GNDA: C21.1 C23.1 R11.1 U4.30 U4.31 | length 19.3
  F.Cu w0.2: U4.30@110.193,55.09 U4.31@110.193,55.59 111.56,55.59 v1(111.76,55.39) ; v1(114.3,58.23) 115.15,59.08 C21.1@116.84,59.08 C23.1@119.38,59.08 119.904,59.08 v1(120.842,58.142)
  F.Cu w0.25: v1(125.095,59.373) 125.195,59.273 R11.1@125.195,58.23
  B.Cu w0.2: v1(111.76,55.39) 114.3,57.93 v1(114.3,58.23) ; v1(120.842,58.142) 120.931,58.23 123.952,58.23 v1(125.095,59.373)
GPIO1: J1.7 U4.101 | length 50.8
  F.Cu w0.2: v1(79.345,63.915) 79.801,63.46 79.801,62.63 79.801,51.649 87.383,44.067 87.405,44.09 U4.101@88.943,44.09 ; v1(82.425,69.538) 81.83,70.134 81.83,86.27 81.83,86.84 J1.7@82.62,87.63
  B.Cu w0.2: v1(79.345,63.915) 80.645,65.215 81.465,65.215 81.843,65.593 81.843,68.572 82.425,69.154 v1(82.425,69.538)
GPIO2: J1.11 U4.102 | length 57.3
  F.Cu w0.2: v1(78.486,64.707) 78.486,63.818 79.401,62.903 79.401,51.484 87.295,43.59 U4.102@88.943,43.59 ; v1(79.9,69.272) 79.8,69.372 79.8,70.25 80.331,70.781 80.331,70.98 80.331,84.22 v1(80.031,84.52) ; v1(82.57,84.63) 86.65,84.63 86.72,84.7 87.7,85.68 J1.11@87.7,87.63
  B.Cu w0.2: v1(78.486,64.707) 78.486,64.976 79.9,66.39 v1(79.9,69.272) ; v1(80.031,84.52) 80.141,84.63 v1(82.57,84.63)
GPIO3: J1.13 U4.110 | length 71
  F.Cu w0.2: v1(80.304,49.513) 79.401,48.61 79.401,47.38 79.401,46.658 v1(84.113,41.946) ; v1(85.344,69.66) 82.629,72.375 82.629,80.019 J1.13@90.24,87.63 ; U4.110@91.318,38.715 91.318,37.765 92.213,36.87 92.22,36.87 92.245,36.895 v1(92.475,36.895)
  B.Cu w0.2: v1(80.304,49.513) 81.999,51.208 81.999,52.674 79.204,55.469 79.204,60.472 83.439,64.707 85.217,64.707 85.471,64.961 85.471,69.406 85.344,69.533 v1(85.344,69.66) ; v1(84.113,41.946) 87.148,38.912 87.148,38.488 88.585,37.05 92.32,37.05 v1(92.475,36.895)
GPIO4: J1.15 U4.47 | length 54.5
  F.Cu w0.2: v1(96.441,65.15) 98.952,65.15 103.318,60.785 U4.47@103.318,59.965
  F.Cu w0.25: v1(94.332,69.32) 94.332,69.922 94.74,70.33 97.679,73.269 97.679,73.71 97.679,74.67 99.15,76.14 102.64,79.631 107.1,79.631 107.331,79.631 108.71,81.01 108.71,82.39 108.7,82.4 108.7,82.42 107.375,83.745 v1(99.941,83.745)
  B.Cu w0.25: J1.15@92.78,87.63 96.665,83.745 v1(99.941,83.745) ; v1(94.332,69.32) 94.332,69.081 96.472,66.941 96.472,65.182 v1(96.441,65.15)
GPIO5: J1.17 U4.135 | length 82.4
  F.Cu w0.2: v1(100.52,84.56) 102.394,84.56 103.015,85.18 103.97,85.18 106.54,85.18 107.975,83.745 109.298,82.422 115.078,82.422 116.228,82.422 117.19,81.46 117.19,80.79 117.19,80.515 116.581,79.906 v1(116.124,79.906) ; v1(103.005,66.042) 102.998,66.049 102.998,67.971 102.699,68.27 102.699,73.439 103.59,74.33 104.471,75.211 105.2,75.211 115.85,75.211 v1(116.15,74.911) ; v1(103.049,53.15) 103.74,52.459 103.74,51.568 102.75,50.577 102.75,43.542 103.841,42.451 103.841,39.41
  B.Cu w0.2: J1.17@95.32,87.63 98.39,84.56 v1(100.52,84.56) ; v1(103.005,66.042) 103.005,59.093 103.67,58.428 103.67,56.58 103.049,55.959 v1(103.049,53.15) ; v1(116.124,79.906) 116.124,74.937 v1(116.15,74.911)
GPIO6: J1.19 U4.137 | length 82
  F.Cu w0.2: v1(101.29,85.38) 101.49,85.58 102.689,85.58 102.94,85.58 106.705,85.58 107.657,84.627 109.464,82.821 115.481,82.821 115.289,82.821 116.394,82.821 117.89,81.325 v1(117.89,80.949) ; v1(103.712,65.335) 103.712,67.822 103.192,68.342 103.099,68.435 103.099,69.2 103.099,73.274 103.293,73.467 104.615,74.79 114.79,74.79 115.38,74.2 115.91,74.2 116.459,74.2 v1(117.17,74.911) ; v1(103.77,55.69) 104.14,55.32 104.14,51.403 103.746,51.009 103.746,50.628 103.149,50.03 103.149,43.726 104.818,42.057 U4.137@104.818,38.715
  B.Cu w0.2: J1.19@97.86,87.63 100.11,85.38 v1(101.29,85.38) ; v1(103.712,65.335) 103.712,58.951 104.07,58.593 104.07,55.99 v1(103.77,55.69) ; v1(117.17,74.911) 116.523,75.558 116.523,75.83 116.523,76.86 116.523,79.316 117.89,80.683 v1(117.89,80.949)